# Altium PCB recall_panel_v0_1.PcbDoc
Units mil, origin at the board's own origin, x right, y up, seen from the top; angles counter-clockwise.
Board outline 2700 x 3000 mil, 2 copper layers (Top Layer, Bottom Layer); 3 components, 0 nets, 6 pads, 0 vias.
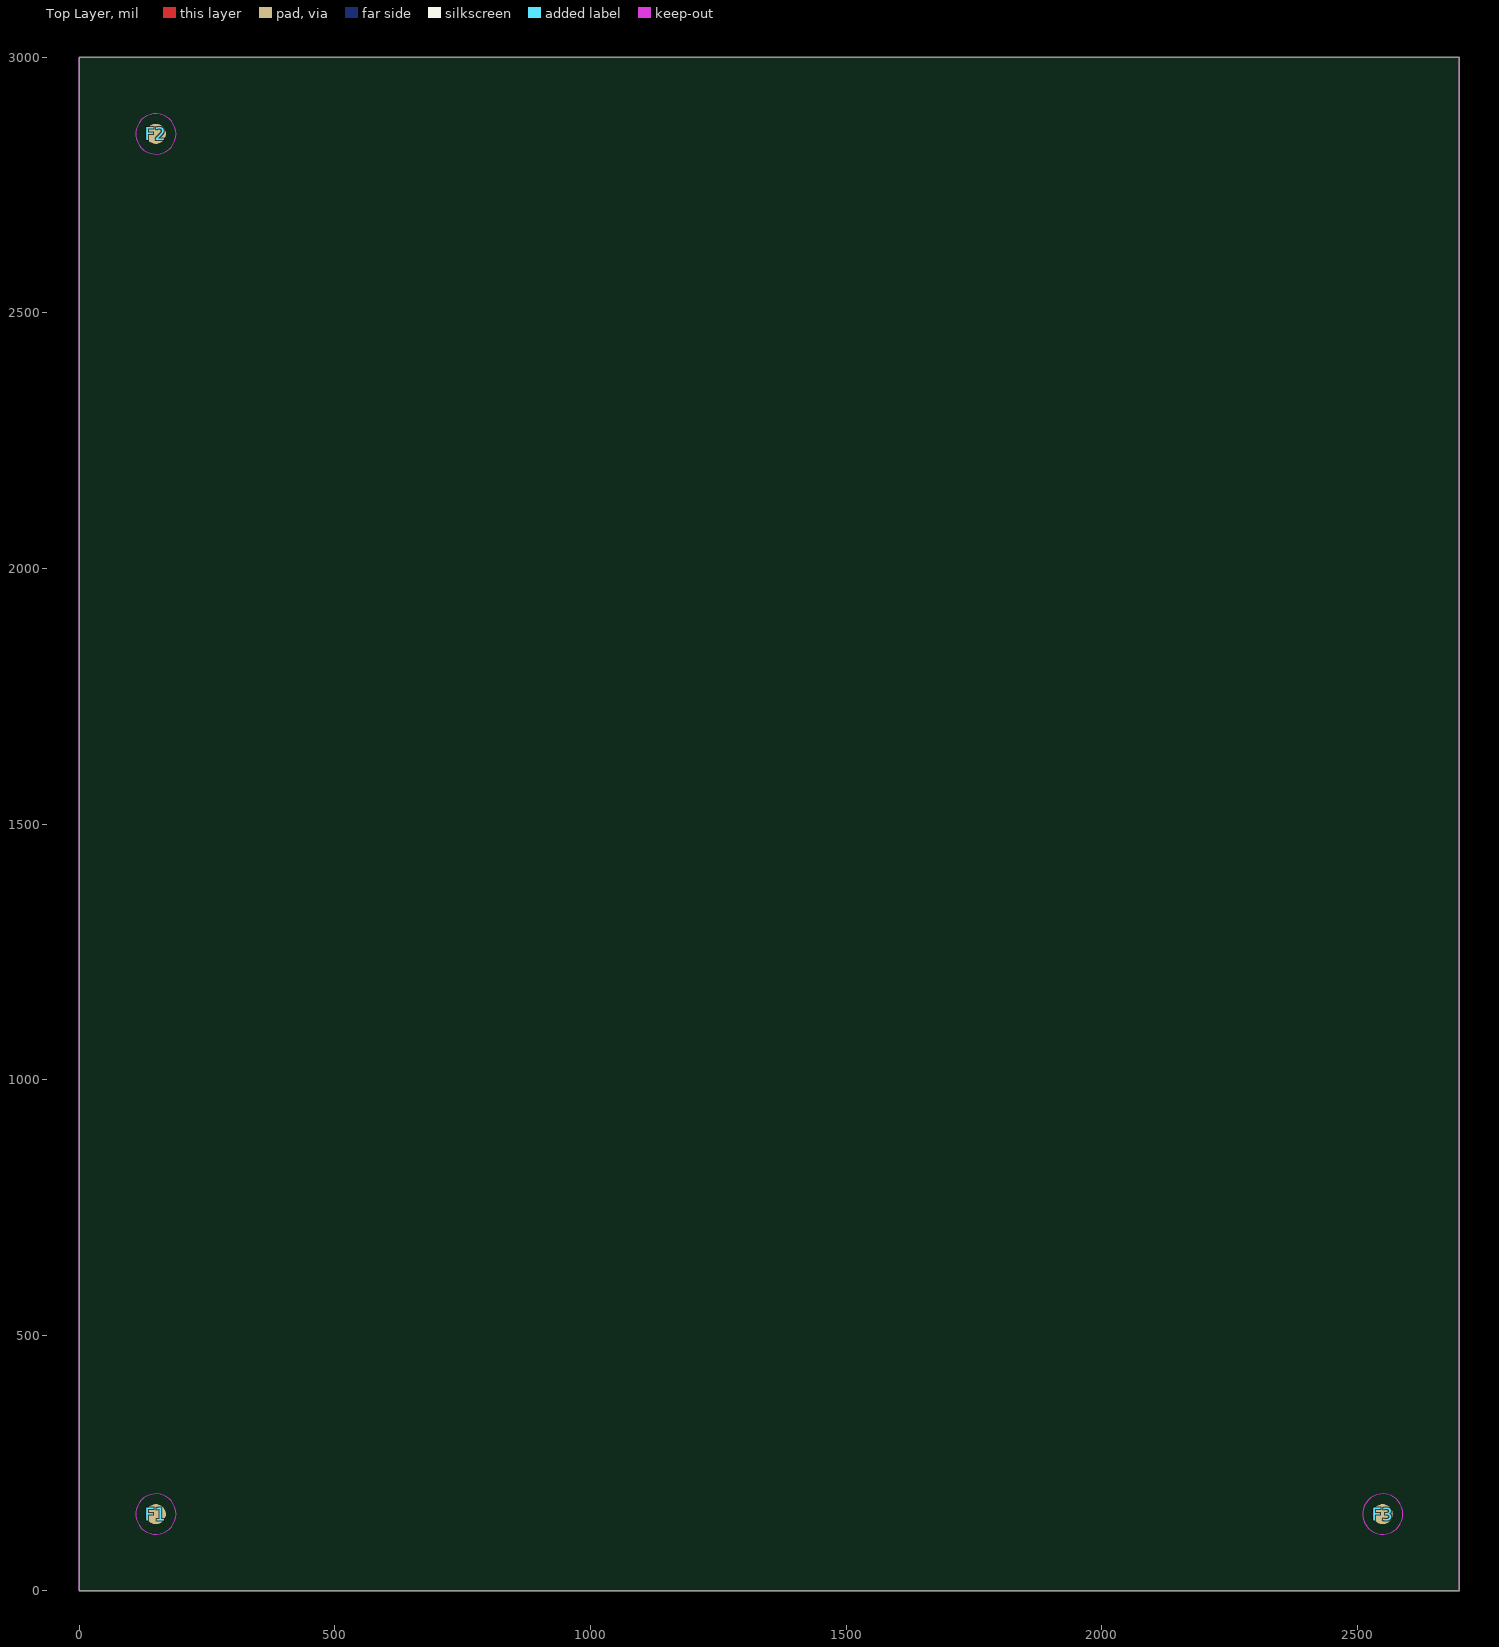
[diagram p0: Top Layer view]
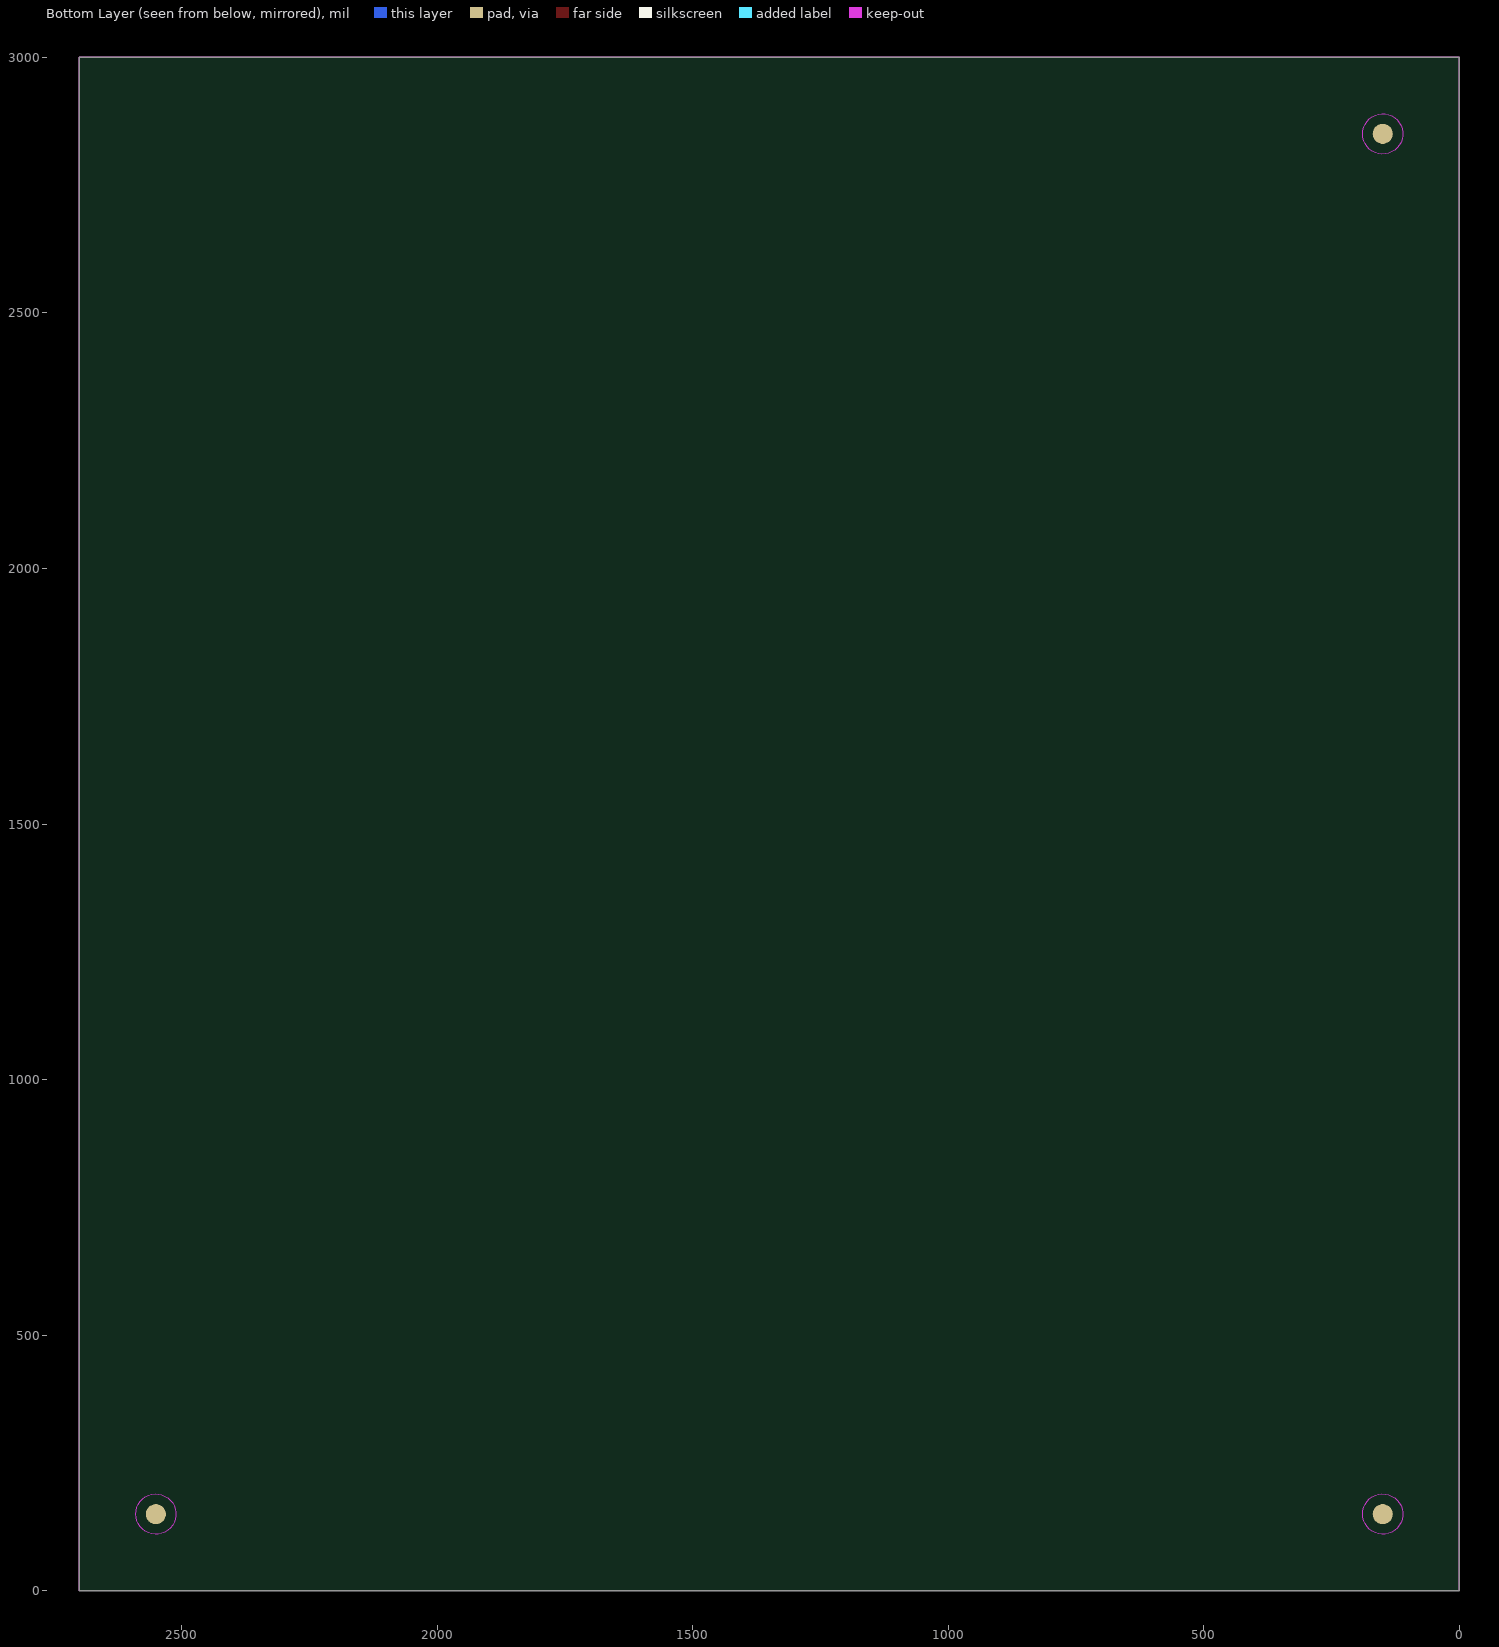
[diagram p1: Bottom Layer view, seen from below]

## Layer stack, top to bottom
Top Solder: solder mask 0.4, Solder Resist, Dk 3.5
Top Layer: signal copper 1.4
Dielectric 1: dielectric 12.6, FR-4, Dk 4.8
Bottom Layer: signal copper 1.4
Bottom Solder: solder mask 0.4, Solder Resist, Dk 3.5

## Board outline
0,0 0,3000 2700,3000 2700,0

## Design rules (kind name [scope] priority, off if disabled: settings)
Clearance [All] p1: gap=10
PolygonConnect [All] p1: connectstyle=Relief reliefconductorwidth=10 reliefentries=4 polygonreliefangle="90 Angle" airgapwidth=10
RoutingVias [All] p1: holewidth=28 width=50 viastyle="Through Hole" minholewidth=28 minwidth=50 maxholewidth=28 maxwidth=50
SolderMaskExpansion [All] p1: expansion=4
Width [All] p1: maxlimit=10 minlimit=10 preferedwidth=10
30 further rules are at their usual default settings.

## Components (designator, comment, footprint, x,y, rotation, side; value= is the part's Value field where it differs from the comment)
F1 "Comment" Fiducial 150,150 r0 top
F2 "Comment" Fiducial 150,2850 r0 top
F3 "Comment" Fiducial 2550,150 r0 top

## Footprints (in the part's own frame and the unit in brackets; to place one, negate y for a bottom-side part, rotate by r counter-clockwise, add the part's x,y. Pads: shape width x height; smd on the part's side, far side on the other; paste and mask are expansions set on the pad)
Fiducial [mm]
  round 1 smd paste-10 mask+0.5: 0(0,0)
  round 1 smd far side paste-10 mask+0.5: 0(0,0)
  Keep-Out Layer circle w0.01: c0,0 r1

## Part data
F1 F2 F3: library part Fiducial

## Nets (pads, with @x,y where several pads share a name; then routed paths per layer and width w, separated by ;. In a path a pad name is that pad's centre, name@x,y a point inside that pad or via, vN(x,y) a via of type N, cw(c..) or ccw(c..) an arc to the next point about the centre after c; other vN are vias at no path point)
pads on no net: F1.0 F2.0 F3.0

## Keep-outs
Keep-Out Layer:
  the board outline again, w1

## Panel: embedded boards
"recall_ble\recall_ble_v0_1.PcbDoc" at 2400,1400, 1 rows x 1 columns, spacing 2500 x 1500, rotation 90
"recall_mcu\recall_mcu_2L_v0_1.PcbDoc" at 300,300, 1 rows x 1 columns, spacing 2500 x 1500, rotation 270
"recall_mcu\recall_mcu_v0_2.PcbDoc" at 1400,300, 1 rows x 1 columns, spacing 2500 x 1500, rotation 270
"recall_ble\recall_ble_mod_v0_1.PcbDoc" at 1300,1400, 1 rows x 1 columns, spacing 2500 x 1500, rotation 90